# Altium PCB USBc to Ethernet(2.0).PcbDoc (part 2 of 3)
Units mil, origin at the board's own origin, x right, y up, seen from the top; angles counter-clockwise.
Board outline 2450 x 1100 mil, 4 copper layers (L1, L2, L3, L4), stack 61.58 mil thick; 85 components, 67 nets, 300 pads, 234 vias.
Unrouted connection lines stored in the file: 3.
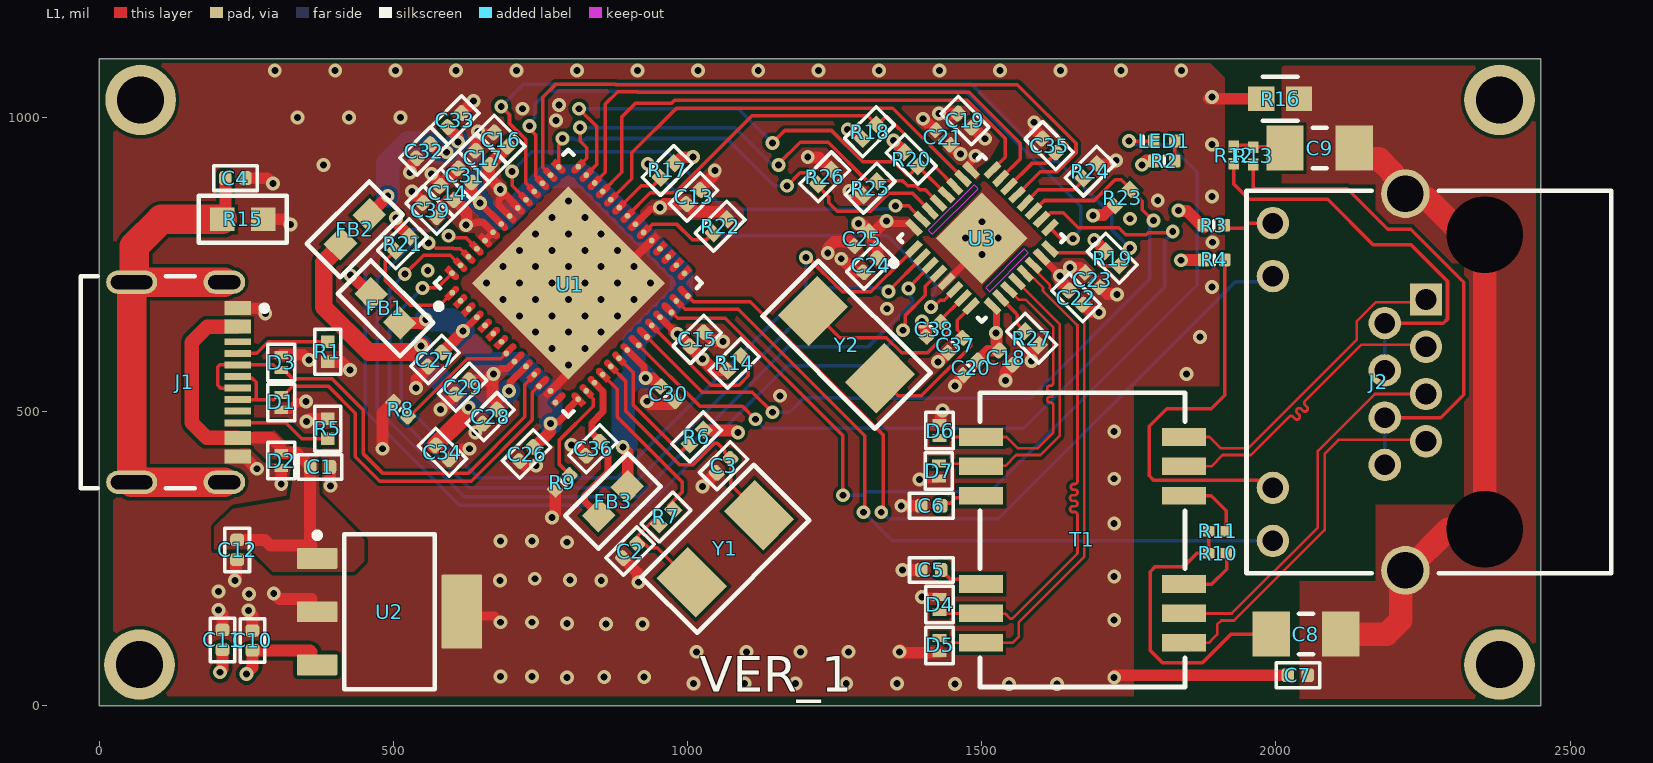
[diagram p0: L1 view]

## Part data (continued)
D2 D6: "TVS DIODE 5.3VWM 12VC SOD882", LCSC Part Number=C3710326, Manufacturer=Littelfuse, Max Breakdown Voltage=9V, Max Operating Temperature=150°C, Min Breakdown Voltage=6.8V, Min Operating Temperature=-55°C, Non-rep Peak Rev Power Dis-Max=40W, Package Body Material=Plastic, Package Shape=Rectangular, Package Style="CHIP CARRIERMeter", Rep Pk Reverse Voltage-Max=5.3V, Supplier Part Number=F9321CT-ND, Category="TVS Diodes", ComponentLink1Description=https://datasheet.ciiva.com:443/pdfs/VipMasterIC/IC/LFSI/LFSI-S-A0007892042/LFSI-S-A0007892042-1.pdf?src-supplier=IHS+Markit, ComponentLink1URL=https://datasheet.ciiva.com:443/pdfs/VipMasterIC/IC/LFSI/LFSI-S-A0007892042/LFSI-S-A0007892042-1.pdf?src-supplier=IHS+Markit, ComponentLink2Description=https://www.littelfuse.com/~/media/electronics/datasheets/tvs_diode_arrays/littelfuse_tvs_diode_array_aq3045_datasheet.pdf.pdf?src-supplier=Digikey, ComponentLink2URL=https://www.littelfuse.com/~/media/electronics/datasheets/tvs_diode_arrays/littelfuse_tvs_diode_array_aq3045_datasheet.pdf.pdf?src-supplier=Digikey, ComponentLink3Description=http://www.littelfuse.com/~/media/electronics/datasheets/tvs_diode_arrays/littelfuse_tvs_diode_array_aq3045_datasheet.pdf.pdf?src-supplier=Digikey, ComponentLink3URL=http://www.littelfuse.com/~/media/electronics/datasheets/tvs_diode_arrays/littelfuse_tvs_diode_array_aq3045_datasheet.pdf.pdf?src-supplier=Digikey, Diode Element Material=SILICON, Diode Type="TRANS VOLTAGE SUPPRESSOR", Manufacturer Part Number=AQ3045-01ETG, Number of Elements=1, Pins=2, Polarity=Bidirectional, Pricing="1=0.5, 10=0.391, 100=0.2344, 500=0.217, 1000=0.14756, 2000=0.13585, 5000=0.1302 (USD)", Reach SVHC Compliant=Yes, Reference Standard=AEC-Q101, RoHS=Yes, RoHS Compliant=Yes, Stock=21664, Supplier=Digikey, Surface Mount=Yes, Technology=AVALANCHE, Terminal Form="No Lead", Terminal Position=BOTTOM
FB1 FB2 FB3: library part MMZ1608B121CTAH0, "FERRITE BEAD 120 OHM 0603 1LN", Case Code (Imperial)=0603, Case Code (Metric)=1608, Current Rating=600mA, DC Resistance (DCR)=150mΩ, Manufacturer=TDK, Manufacturer Lifecycle Status=PRODUCTION, Max Operating Temperature=125°C, Min Operating Temperature=-55°C, Test Frequency=100MHz, Tolerance=25%, Case/Package=0603, Category="Ferrite Beads and Chips", ComponentLink1Description=https://datasheet.octopart.com:443/MMZ1608B121CTAH0-TDK-datasheet-151651381.pdf?src-supplier=ODG+(Origin+Data+Global), ComponentLink1URL=https://datasheet.octopart.com:443/MMZ1608B121CTAH0-TDK-datasheet-151651381.pdf?src-supplier=ODG+(Origin+Data+Global), ComponentLink2Description=https://datasheet.octopart.com:443/MMZ1608B121CTAH0-TDK-datasheet-41213274.pdf?src-supplier=Upverter, ComponentLink2URL=https://datasheet.octopart.com:443/MMZ1608B121CTAH0-TDK-datasheet-41213274.pdf?src-supplier=Upverter, ComponentLink3Description=https://datasheet.octopart.com:443/MMZ1608B121CTAH0-TDK-datasheet-82475256.pdf?src-supplier=Newark, ComponentLink3URL=https://datasheet.octopart.com:443/MMZ1608B121CTAH0-TDK-datasheet-82475256.pdf?src-supplier=Newark, ComponentLink4Description=https://datasheet.octopart.com:443/MMZ1608B121CTAH0-TDK-datasheet-101614771.pdf?src-supplier=Newark, ComponentLink4URL=https://datasheet.octopart.com:443/MMZ1608B121CTAH0-TDK-datasheet-101614771.pdf?src-supplier=Newark, ComponentLink5Description=https://datasheet.octopart.com:443/MMZ1608B121CTAH0-TDK-datasheet-17595614.pdf?src-supplier=TME, ComponentLink5URL=https://datasheet.octopart.com:443/MMZ1608B121CTAH0-TDK-datasheet-17595614.pdf?src-supplier=TME, Core Material=Ferrite, Depth=800µm, Export Control Classification Number (ECCN) Code=EAR99, Harmonized Tariff Schedule (HTS) Code=8504.50.80.00, Height=600µm, Impedance=120Ω, Introduction Date=2009-03-27, Length=1.6mm, Lifecycle Status=Production, Manufacturer Part Number=MMZ1608B121CTAH0, Max DC Current=600mA, Max Length=1.75mm, Max Width=950µm, Min Length=1.45mm, Min Width=650µm, Mount="Surface Mount", Number of Circuits=1, Number of Terminals=2, Pricing 1="1=0.1, 10=0.053, 25=0.046, 50=0.0414, 100=0.0372, 250=0.03208, 500=0.02858, 1000=0.02535 (USD)", REACH SVHC=Unaffected, Resistance=150mΩ, RMS Current (Irms)=600mA, RoHS=Compliant, Schedule B="8504500000, 8504500000|8504500000|8504500000|8504500000|8504500000", Series Resistance=150mΩ, Stock 1=284237, Supplier 1=DigiKey, Width=800µm
J1: library part 217179-0001, "USB-C (USB TYPE-C) USB 2.0 Receptacle Connector 24 (16+8 Dummy) Position Surface Mount, Right Angle; Through Hole", Contact Resistance=50mΩ, Current Rating=1.25A, Dielectric Material=Polyamide, Insulation Color=Black, Insulation Resistance=100MΩ, Manufacturer=Molex, Manufacturer Lifecycle Status=ACTIVE, Max Operating Temperature=85°C, Min Operating Temperature=-40°C, Voltage Rating=30V, Category="USB Connectors", China RoHS=Compliant, ComponentLink1Description=https://datasheet.octopart.com:443/217179-0001-Molex-datasheet-158871109.pdf?src-supplier=ODG+(Origin+Data+Global), ComponentLink1URL=https://datasheet.octopart.com:443/217179-0001-Molex-datasheet-158871109.pdf?src-supplier=ODG+(Origin+Data+Global), ComponentLink2Description=https://sigma.octopart.com:443/158871110/technical_drawing/Molex-217179-0001.pdf?src-supplier=Upverter, ComponentLink2URL=https://sigma.octopart.com:443/158871110/technical_drawing/Molex-217179-0001.pdf?src-supplier=Upverter, ComponentLink3Description=https://datasheet.octopart.com:443/217179-0001-Molex-datasheet-164573281.pdf?src-supplier=RS+(Formerly+Allied+Electronics), ComponentLink3URL=https://datasheet.octopart.com:443/217179-0001-Molex-datasheet-164573281.pdf?src-supplier=RS+(Formerly+Allied+Electronics), ComponentLink4Description=http://sigma.octopart.com:80/reach_statement/Molex-company-74.pdf?src-supplier=Compliance+Statements, ComponentLink4URL=http://sigma.octopart.com:80/reach_statement/Molex-company-74.pdf?src-supplier=Compliance+Statements, ComponentLink5Description=http://sigma.octopart.com:80/rohs_statement/Molex-company-73.pdf?src-supplier=Compliance+Statements, ComponentLink5URL=http://sigma.octopart.com:80/rohs_statement/Molex-company-73.pdf?src-supplier=Compliance+Statements, ComponentLink6Description=http://sigma.octopart.com:80/conflict_mineral_statement/Molex-company-72.pdf?src-supplier=Compliance+Statements, ComponentLink6URL=http://sigma.octopart.com:80/conflict_mineral_statement/Molex-company-72.pdf?src-supplier=Compliance+Statements, Contact Material="Gold, Nickel", Country of Origin="Mainland China", Export Control Classification Number (ECCN) Code=EAR99, Gender=Female, Harmonized Tariff Schedule (HTS) Code=8536.69.40.30, Height=3.36mm, Introduction Date=2021-08-30, Lifecycle Status=Production, Manufacturer Part Number=217179-0001, Number of Contacts=16, Number of Ports=1, Number of Positions=16, Number of Rows=1, Orientation="Right Angle", Pricing 1="1=0.9, 10=0.764, 25=0.7156, 50=0.6814, 100=0.6487, 250=0.60808, 500=0.57902 (USD)", REACH SVHC=Unaffected, RoHS=Compliant, Shell Finish=Nickel, Shell Material="Stainless Steel", Stock 1=93695, Supplier 1=DigiKey, Terminal Pitch=500µm, USB Standard="USB 2.0"
J2: library part CMP-2000-06980-1, "High Speed RJ45, Modular Jack, 8 Position, 8 Contacts, Shielded, with LEDs, -55 to 85 degC,12-Pin THD, RoHS, Tray", LED Color=Yellow-Green, Manufacturer=Amphenol, Operating Temperature=-55°C~85°C, Package Description="12-Pin Through Hole Device, Body 16.51 x 15.75 mm", Ratings=-, Standard Package=120, 3D Model=RJHSE538x.stpRJHSE538x.igs, Catalog Drawings=RJ45SeriesRightAngle, Category=Connectors,Interconnects, Connector Type=Jack, Contact Finish=Gold, Contact Finish Thickness=50µin(1.27µm), Contact Material=PhosphorBronze, Datasheet URL=https://datasheet.ciiva.com/16481/rjhse538x-16481714.pdf, Datasheet Version="Rev. K, 04/2014", Family=ModularConnectors-Jacks, Featured Product=ModularJacksProductSolutions, Features=BoardLock, Housing Material=Thermoplastic, Ingress Protection=-, Manufacturer URL=http://www.amphenol.com/, Mounting Technology=ThroughHole, Mounting Type=ThroughHole, Number of Ports=1, Number of Positions/Contacts=8p8c(RJ45,Ethernet), Number of Rows=1, Online Catalog=RJHSESeries, Orientation=90°Angle(Right), Other Names=RJHSE5381, Package Reference=RJHSE-5381, Packaging=Tray, PCN Design/Specification=MultipleSeriesCopper29/Jan/2009RJHSEShieldMaterial30/Jun/2015, Series=RJHSE, Shielding=Shielded,EMIFinger, Tab Direction=Up, Termination=Solder
LED1: library part CMP-007-00042-3, "Chip LED 0402, Blue, 0.02 A, 3.1 to 3.7 V, -40 to 80 degC, 2-Pin SMD, RoHS, Tape and Reel", Case/Package=0402, Colour=Blue, Mounting Technology=SMT, Pins=2, RoHS Compliant=Yes
R1 R5: library part AF0402FR-075K1L, "5.1 kOhms ±1% 0.063W, 1/16W Chip Resistor 0402 (1005 Metric) Anti-Sulfur, Automotive AEC-Q200 Thick Film", Case/Package=0402, Manufacturer="Yageo Group", Max Operating Temperature=155°C, Max Power Dissipation=63mW, Min Operating Temperature=-55°C, Power Rating=62.5mW, Ratings=AEC-Q200, Resistance=5.1kΩ, Temperature Coefficient=100ppm/°C, Tolerance=1%, Voltage Rating=50V, Category="Chip SMD Resistors", China RoHS=Non-Compliant, ComponentLink1Description=https://datasheet.octopart.com:443/AF0402FR-075K1L-Yageo-datasheet-182189395.pdf?src-supplier=IHS, ComponentLink1URL=https://datasheet.octopart.com:443/AF0402FR-075K1L-Yageo-datasheet-182189395.pdf?src-supplier=IHS, ComponentLink2Description=https://datasheet.octopart.com:443/AF0402FR-075K1L-Yageo-datasheet-153645569.pdf?src-supplier=Upverter, ComponentLink2URL=https://datasheet.octopart.com:443/AF0402FR-075K1L-Yageo-datasheet-153645569.pdf?src-supplier=Upverter, ComponentLink3Description=https://sigma.octopart.com:443/138820526/technical_drawing/Yageo-AF0402FR-075K1L.pdf?src-supplier=Upverter, ComponentLink3URL=https://sigma.octopart.com:443/138820526/technical_drawing/Yageo-AF0402FR-075K1L.pdf?src-supplier=Upverter, ComponentLink4Description=https://datasheet.octopart.com:443/AF0402FR-075K1L-Yageo-Group-datasheet-183876366.pdf?src-supplier=LCSC, ComponentLink4URL=https://datasheet.octopart.com:443/AF0402FR-075K1L-Yageo-Group-datasheet-183876366.pdf?src-supplier=LCSC, ComponentLink5Description=https://datasheet.octopart.com:443/AF0402FR-075K1L-Yageo-datasheet-164730775.pdf?src-supplier=Future+Electronics, ComponentLink5URL=https://datasheet.octopart.com:443/AF0402FR-075K1L-Yageo-datasheet-164730775.pdf?src-supplier=Future+Electronics, ComponentLink6Description=https://datasheet.octopart.com:443/AF0402FR-075K1L-Yageo-datasheet-137481464.pdf?src-supplier=Future+Electronics, ComponentLink6URL=https://datasheet.octopart.com:443/AF0402FR-075K1L-Yageo-datasheet-137481464.pdf?src-supplier=Future+Electronics, ComponentLink7Description=https://datasheet.octopart.com:443/AF0402FR-075K1L-Yageo-datasheet-65873192.pdf?src-supplier=Future+Electronics, ComponentLink7URL=https://datasheet.octopart.com:443/AF0402FR-075K1L-Yageo-datasheet-65873192.pdf?src-supplier=Future+Electronics, ComponentLink8Description=https://datasheet.octopart.com:443/AF0402FR-075K1L-Yageo-datasheet-39119213.pdf?src-supplier=Future+Electronics, ComponentLink8URL=https://datasheet.octopart.com:443/AF0402FR-075K1L-Yageo-datasheet-39119213.pdf?src-supplier=Future+Electronics, ComponentLink9Description=https://datasheet.octopart.com:443/AF0402FR-075K1L-Yageo-datasheet-34148693.pdf?src-supplier=Future+Electronics, ComponentLink9URL=https://datasheet.octopart.com:443/AF0402FR-075K1L-Yageo-datasheet-34148693.pdf?src-supplier=Future+Electronics, ComponentLink10Description=https://datasheet.octopart.com:443/AF0402FR-075K1L-Yageo-datasheet-27714391.pdf?src-supplier=Future+Electronics, ComponentLink10URL=https://datasheet.octopart.com:443/AF0402FR-075K1L-Yageo-datasheet-27714391.pdf?src-supplier=Future+Electronics, ComponentLink11Description=https://datasheet.octopart.com:443/AF0402FR-075K1L-Yageo-datasheet-20945081.pdf?src-supplier=Future+Electronics, ComponentLink11URL=https://datasheet.octopart.com:443/AF0402FR-075K1L-Yageo-datasheet-20945081.pdf?src-supplier=Future+Electronics, ComponentLink12Description=https://datasheet.octopart.com/AF0402FR-075K1L-Yageo-datasheet-68296209.pdf, ComponentLink12URL=https://datasheet.octopart.com/AF0402FR-075K1L-Yageo-datasheet-68296209.pdf, ComponentLink13Description=http://sigma.octopart.com:80/conflict_mineral_statement/Yageo-company-3.pdf?src-supplier=Compliance+Statements, ComponentLink13URL=http://sigma.octopart.com:80/conflict_mineral_statement/Yageo-company-3.pdf?src-supplier=Compliance+Statements, ComponentLink14Description=http://sigma.octopart.com:80/rohs_statement/Yageo-company-2.pdf?src-supplier=Compliance+Statements, ComponentLink14URL=http://sigma.octopart.com:80/rohs_statement/Yageo-company-2.pdf?src-supplier=Compliance+Statements, Composition="Thick Film", Features="Anti-Sulfur, Moisture Resistant", Height=350µm, Lead Free="Lead Free", Length=1mm, Lifecycle Status=Production, Manufacturer Part Number=AF0402FR-075K1L, Mount="Surface Mount", Number of Terminals=2, Number of Terminations=2, Pricing 1="1=0.1, 10=0.041, 25=0.0312, 50=0.0256, 100=0.0212, 250=0.01684, 500=0.01436, 1000=0.01241, 5000=0.00931 (USD)", REACH SVHC=Unaffected, RoHS=Compliant, Stock 1=1902, Supplier 1=DigiKey, Width=500µm, Working Voltage=50V
R2 R3 R4: library part CMP-009-00132-3, "Chip Resistor, 330 Ohms, +/-5 %, 63 mW, -55 to 155 degC, 0402", Case/Package=0402, Max Operating Temperature=155°C, Min Operating Temperature=-55°C, Power=63mW, Tolerance=5%, Pins=2
R6: library part RC0402JR-070RL, "RES 0 OHM JUMPER 1/16W 0402", Case/Package=0402, LCSC Part Number=C60485, Manufacturer=Yageo, Max Operating Temperature=155°C, Min Operating Temperature=-55°C, Package Height=0.35mm, Package Length=1mm, Package Shape=Rectangular, Package Style=SMTMeter, Package Width=0.5mm, Power=62.5mW, Rated Temperature=70°C, Resistor Type="FIXED RESISTOR", Supplier Part Number=311-0.0JRCT-ND, Category="Chip SMD Resistors", ComponentLink1Description=https://datasheet.ciiva.com:443/pdfs/VipMasterIC/IC/YAGO/YAGO-S-A0008145938/YAGO-S-A0008145938-1.pdf?src-supplier=IHS+Markit, ComponentLink1URL=https://datasheet.ciiva.com:443/pdfs/VipMasterIC/IC/YAGO/YAGO-S-A0008145938/YAGO-S-A0008145938-1.pdf?src-supplier=IHS+Markit, Construction=Chip, JESD-609 Code=e3, Manufacturer Part Number=RC0402JR-070RL, Mounting Technology="Surface Mount", Packaging="Tape and Reel", Pins=2, Pricing="1=0.1, 10=0.011, 25=0.0084, 50=0.0064, 100=0.0045, 250=0.00364, 500=0.0029, 1000=0.00214, 5000=0.00154 (USD)", Reach SVHC Compliant=Yes, RoHS=Yes, RoHS Compliant=Yes, Stock=5988729, Supplier=Digikey, Technology="METAL GLAZE/THICK FILM", Terminal Finish=Nickel, Termination=Wraparound
R7: library part RT0402FRE07500RL, "500 Ohms 1% 0.063W, 1/16W Chip Resistor 0402 (1005 Metric) Moisture Resistant", Case/Package=0402, Manufacturer="Yageo Group", Max Operating Temperature=155°C, Min Operating Temperature=-55°C, Power Rating=63mW, Resistance=500Ω, Temperature Coefficient=50ppm/°C, Tolerance=1%, Voltage Rating=50V, Category="Chip SMD Resistors", ComponentLink1Description=https://datasheet.octopart.com:443/RT0402FRE07500RL-Yageo-datasheet-176402239.pdf?src-supplier=element14+APAC, ComponentLink1URL=https://datasheet.octopart.com:443/RT0402FRE07500RL-Yageo-datasheet-176402239.pdf?src-supplier=element14+APAC, ComponentLink2Description=https://sigma.octopart.com:443/138820526/technical_drawing/Yageo-RT0402FRE07500RL.pdf?src-supplier=Upverter, ComponentLink2URL=https://sigma.octopart.com:443/138820526/technical_drawing/Yageo-RT0402FRE07500RL.pdf?src-supplier=Upverter, ComponentLink3Description=https://datasheet.octopart.com:443/RT0402FRE07500RL-Yageo-Group-datasheet-188167888.pdf?src-supplier=LCSC, ComponentLink3URL=https://datasheet.octopart.com:443/RT0402FRE07500RL-Yageo-Group-datasheet-188167888.pdf?src-supplier=LCSC, ComponentLink4Description=https://datasheet.octopart.com/RT0402FRE07500RL-Yageo-datasheet-86813807.pdf, ComponentLink4URL=https://datasheet.octopart.com/RT0402FRE07500RL-Yageo-datasheet-86813807.pdf, ComponentLink5Description=http://sigma.octopart.com:80/conflict_mineral_statement/Yageo-company-3.pdf?src-supplier=Compliance+Statements, ComponentLink5URL=http://sigma.octopart.com:80/conflict_mineral_statement/Yageo-company-3.pdf?src-supplier=Compliance+Statements, ComponentLink6Description=http://sigma.octopart.com:80/rohs_statement/Yageo-company-2.pdf?src-supplier=Compliance+Statements, ComponentLink6URL=http://sigma.octopart.com:80/rohs_statement/Yageo-company-2.pdf?src-supplier=Compliance+Statements, Composition="Thin Film", Height=350µm, Manufacturer Part Number=RT0402FRE07500RL, Packaging="Tape & Reel", Pricing 1="1=0.1, 10=0.014, 50=0.0126, 100=0.0119, 500=0.01044 (USD)", RoHS=Compliant, Supplier 1=DigiKey
R8 R9: library part CMP-009-00071-2, "12K 0.063W 1% 0402 (1005 Metric)  SMD", Case/Package=0402, Power=63mW, Tolerance=1%, Mounting Technology=SMT, Pins=2
R10 R11 R12 R13: library part CMP-2002-07798-1, Manufacturer="Yageo / Phycomp", Part Number=RC0402FR-0775RL
R14 R18 R19 R20 R21 R22 R24 R25 R26: library part AC0402FR-0710KL, "RES SMD 10K OHM 1% 1/16W 0402", Case Code (Imperial)=0402, Case Code (Metric)=1005, Manufacturer="Yageo Group", Max Operating Temperature=155°C, Max Power Dissipation=63mW, Min Operating Temperature=-55°C, Power Rating=62.5mW, Ratings=AEC-Q200, Resistance=10kΩ, Temperature Coefficient=100ppm/°C, Tolerance=1%, Voltage Rating=50V, Case/Package=0402, Category="Chip SMD Resistors", China RoHS=Non-Compliant, ComponentLink1Description=https://datasheet.octopart.com:443/AC0402FR-0710KL-Yageo-datasheet-182189377.pdf?src-supplier=IHS, ComponentLink1URL=https://datasheet.octopart.com:443/AC0402FR-0710KL-Yageo-datasheet-182189377.pdf?src-supplier=IHS, ComponentLink2Description=https://datasheet.octopart.com:443/AC0402FR-0710KL-Yageo-datasheet-83209224.pdf?src-supplier=Upverter, ComponentLink2URL=https://datasheet.octopart.com:443/AC0402FR-0710KL-Yageo-datasheet-83209224.pdf?src-supplier=Upverter, ComponentLink3Description=https://datasheet.octopart.com:443/AC0402FR-0710KL-Yageo-datasheet-178509465.pdf?src-supplier=Newark, ComponentLink3URL=https://datasheet.octopart.com:443/AC0402FR-0710KL-Yageo-datasheet-178509465.pdf?src-supplier=Newark, ComponentLink4Description=https://datasheet.octopart.com:443/AC0402FR-0710KL-Yageo-datasheet-166720450.pdf?src-supplier=JRH+Electronics, ComponentLink4URL=https://datasheet.octopart.com:443/AC0402FR-0710KL-Yageo-datasheet-166720450.pdf?src-supplier=JRH+Electronics, ComponentLink5Description=https://datasheet.octopart.com:443/AC0402FR-0710KL-Yageo-datasheet-151884373.pdf?src-supplier=Future+Electronics, ComponentLink5URL=https://datasheet.octopart.com:443/AC0402FR-0710KL-Yageo-datasheet-151884373.pdf?src-supplier=Future+Electronics, ComponentLink6Description=https://datasheet.octopart.com:443/AC0402FR-0710KL-Yageo-Group-datasheet-189830439.pdf?src-supplier=Future+Electronics, ComponentLink6URL=https://datasheet.octopart.com:443/AC0402FR-0710KL-Yageo-Group-datasheet-189830439.pdf?src-supplier=Future+Electronics, ComponentLink7Description=https://datasheet.octopart.com:443/AC0402FR-0710KL-Yageo-datasheet-137699919.pdf?src-supplier=Future+Electronics, ComponentLink7URL=https://datasheet.octopart.com:443/AC0402FR-0710KL-Yageo-datasheet-137699919.pdf?src-supplier=Future+Electronics, ComponentLink8Description=https://datasheet.octopart.com:443/AC0402FR-0710KL-Yageo-datasheet-24580492.pdf?src-supplier=Future+Electronics, ComponentLink8URL=https://datasheet.octopart.com:443/AC0402FR-0710KL-Yageo-datasheet-24580492.pdf?src-supplier=Future+Electronics, ComponentLink9Description=https://datasheet.octopart.com:443/AC0402FR-0710KL-Yageo-datasheet-13029202.pdf?src-supplier=Future+Electronics, ComponentLink9URL=https://datasheet.octopart.com:443/AC0402FR-0710KL-Yageo-datasheet-13029202.pdf?src-supplier=Future+Electronics, ComponentLink10Description=https://datasheet.octopart.com/AC0402FR-0710KL-Yageo-datasheet-12512238.pdf, ComponentLink10URL=https://datasheet.octopart.com/AC0402FR-0710KL-Yageo-datasheet-12512238.pdf, ComponentLink11Description=https://datasheet.octopart.com:443/AC0402FR-0710KL-Yageo-Group-datasheet-164768995.pdf?src-supplier=ODG+(Origin+Data+Global), ComponentLink11URL=https://datasheet.octopart.com:443/AC0402FR-0710KL-Yageo-Group-datasheet-164768995.pdf?src-supplier=ODG+(Origin+Data+Global), ComponentLink12Description=https://datasheet.octopart.com:443/AC0402FR-0710KL-Yageo-datasheet-128677448.pdf?src-supplier=X-ON, ComponentLink12URL=https://datasheet.octopart.com:443/AC0402FR-0710KL-Yageo-datasheet-128677448.pdf?src-supplier=X-ON, ComponentLink13Description=http://sigma.octopart.com:80/conflict_mineral_statement/Yageo-company-3.pdf?src-supplier=Compliance+Statements, ComponentLink13URL=http://sigma.octopart.com:80/conflict_mineral_statement/Yageo-company-3.pdf?src-supplier=Compliance+Statements, ComponentLink14Description=http://sigma.octopart.com:80/rohs_statement/Yageo-company-2.pdf?src-supplier=Compliance+Statements, ComponentLink14URL=http://sigma.octopart.com:80/rohs_statement/Yageo-company-2.pdf?src-supplier=Compliance+Statements, Composition="Thick Film", Country of Origin="Mainland China, Taiwan", Depth=500µm, Export Control Classification Number (ECCN) Code=EAR99, Features="Automotive AEC-Q200, Moisture Resistant", Harmonized Tariff Schedule (HTS) Code=8533.21.00.30, Height=320µm, Introduction Date=2012-04-10, Lead Free="Lead Free", Length=1mm, Lifecycle Status=Production, Manufacturer Part Number=AC0402FR-0710KL, Military Standard=Not, Mount="Surface Mount", Number of Terminals=2, Number of Terminations=2, Packaging="Tape & Reel", Pricing 1="1=0.1, 10=0.024, 25=0.0176, 50=0.014, 100=0.0114, 250=0.00876, 500=0.00726, 1000=0.00612, 5000=0.00431 (USD)", REACH SVHC=Unaffected, RoHS=Compliant, Schedule B="8533210045, 8533210045|8533210045|8533210045|8533210045|8533210045|8533210045|8533210045|8533210045|8533210045|8533210045|8533210045|8533210045|8533210045|8533210045|8533210045|8533210045|8533210045|8533210045|8533210045, 8533210045|8533210045|8533210045|8533210045|8533210045|8533210045|8533210045|8533210045|8533210045|8533210045|8533210045|8533210045|8533210045|8533210045|8533210045|8533210045|8533210045|8533210045|8533210045|8533210045|8533210045|8533210045|8533210045|85", Stock 1=3191206, Supplier 1=DigiKey, Termination=SMD/SMT, Width=500µm, Working Voltage=50V
R15: library part AC0603FR-0710ML, "Res Thick Film 0603 10M Ohm 1% 0.1W(1/10W) ±100ppm/C Pad SMD T/R Automotive AEC-Q200", Case Code (Imperial)=0603, Case Code (Metric)=1608, Manufacturer="Yageo Group", Max Operating Temperature=155°C, Max Power Dissipation=100mW, Min Operating Temperature=-55°C, Ratings=AEC-Q200, Resistance=10MΩ, Temperature Coefficient=100ppm/°C, Tolerance=1%, Voltage Rating=75V, Case/Package=0603, Category="Chip SMD Resistors", China RoHS=Non-Compliant, ComponentLink1Description=https://datasheet.octopart.com:443/AC0603FR-0710ML-Yageo-datasheet-182189377.pdf?src-supplier=IHS, ComponentLink1URL=https://datasheet.octopart.com:443/AC0603FR-0710ML-Yageo-datasheet-182189377.pdf?src-supplier=IHS, ComponentLink2Description=https://datasheet.octopart.com:443/AC0603FR-0710ML-Yageo-datasheet-86786639.pdf?src-supplier=Upverter, ComponentLink2URL=https://datasheet.octopart.com:443/AC0603FR-0710ML-Yageo-datasheet-86786639.pdf?src-supplier=Upverter, ComponentLink3Description=https://datasheet.octopart.com:443/AC0603FR-0710ML-Yageo-datasheet-178509465.pdf?src-supplier=Newark, ComponentLink3URL=https://datasheet.octopart.com:443/AC0603FR-0710ML-Yageo-datasheet-178509465.pdf?src-supplier=Newark, ComponentLink4Description=https://datasheet.octopart.com:443/AC0603FR-0710ML-Yageo-Group-datasheet-188689268.pdf?src-supplier=LCSC, ComponentLink4URL=https://datasheet.octopart.com:443/AC0603FR-0710ML-Yageo-Group-datasheet-188689268.pdf?src-supplier=LCSC, ComponentLink5Description=https://datasheet.octopart.com:443/AC0603FR-0710ML-Yageo-datasheet-166720450.pdf?src-supplier=Future+Electronics, ComponentLink5URL=https://datasheet.octopart.com:443/AC0603FR-0710ML-Yageo-datasheet-166720450.pdf?src-supplier=Future+Electronics, ComponentLink6Description=https://datasheet.octopart.com:443/AC0603FR-0710ML-Yageo-datasheet-151884373.pdf?src-supplier=Future+Electronics, ComponentLink6URL=https://datasheet.octopart.com:443/AC0603FR-0710ML-Yageo-datasheet-151884373.pdf?src-supplier=Future+Electronics, ComponentLink7Description=https://datasheet.octopart.com:443/AC0603FR-0710ML-Yageo-datasheet-137699919.pdf?src-supplier=Future+Electronics, ComponentLink7URL=https://datasheet.octopart.com:443/AC0603FR-0710ML-Yageo-datasheet-137699919.pdf?src-supplier=Future+Electronics, ComponentLink8Description=https://datasheet.octopart.com:443/AC0603FR-0710ML-Yageo-datasheet-128678881.pdf?src-supplier=X-ON, ComponentLink8URL=https://datasheet.octopart.com:443/AC0603FR-0710ML-Yageo-datasheet-128678881.pdf?src-supplier=X-ON, ComponentLink9Description=https://datasheet.octopart.com/AC0603FR-0710ML-Yageo-datasheet-12512238.pdf, ComponentLink9URL=https://datasheet.octopart.com/AC0603FR-0710ML-Yageo-datasheet-12512238.pdf, ComponentLink10Description=http://sigma.octopart.com:80/conflict_mineral_statement/Yageo-company-3.pdf?src-supplier=Compliance+Statements, ComponentLink10URL=http://sigma.octopart.com:80/conflict_mineral_statement/Yageo-company-3.pdf?src-supplier=Compliance+Statements, ComponentLink11Description=http://sigma.octopart.com:80/rohs_statement/Yageo-company-2.pdf?src-supplier=Compliance+Statements, ComponentLink11URL=http://sigma.octopart.com:80/rohs_statement/Yageo-company-2.pdf?src-supplier=Compliance+Statements, Composition="Thick Film", Country of Origin="Mainland China, Taiwan", Export Control Classification Number (ECCN) Code=EAR99, Features="Automotive AEC-Q200, Moisture Resistant", Harmonized Tariff Schedule (HTS) Code=8533.21.00.30, Height=450µm, Introduction Date=2012-04-10, Length=1.6mm, Lifecycle Status=Production, Manufacturer Part Number=AC0603FR-0710ML, Mount="Surface Mount", Number of Terminals=2, Number of Terminations=2, Packaging="Tape & Reel", Power Rating=100mW, Pricing 1="1=0.1, 10=0.028, 25=0.0204, 50=0.0164, 100=0.0134, 250=0.01036, 500=0.00868, 1000=0.00735 (USD)", REACH SVHC=Unaffected, RoHS=Compliant, Schedule B="8533210045, 8533210045|8533210045|8533210045|8533210045|8533210045|8533210045|8533210045|8533210045|8533210045|8533210045|8533210045|8533210045|8533210045, 8533210045|8533210045|8533210045|8533210045|8533210045|8533210045|8533210045|8533210045|8533210045|8533210045|8533210045|8533210045|8533210045|8533210045, 8533210045|8533210045|8533210045|8533210045|8533210045|8533210045|8533210045|8533210045|8533210045|8533210045|8533210045|8533210045|8533210045|8533210045|8533210045", Stock 1=74416, Supplier 1=DigiKey, Termination=SMD/SMT, Weight=2.012816mg, Width=800µm, Working Voltage=75V
R16: library part CMP-2000-03843-2, "RES Thick Film, 10MΩ, 1%, 0.1W, 100ppm/°C, 0603", Case Code (Imperial)=0603, Case Code (Metric)=1608, Max Operating Temperature=155°C, Min Operating Temperature=-55°C, Package Quantity=5000, Power Rating=100mW, Resistance=10MR, Temperature Coefficient=100ppm/°C, Tolerance=1%, Voltage Rating=75V, Case/Package=0603, Composition="Thick Film", Contact Plating=Tin, Depth=0.85mm, Height=0.45mm, Lead Free="Lead Free", Length=1.55mm, Military Standard=Not, Mount="Surface Mount", Number of Terminations=2, Packaging="Tape and Reel", Radiation Hardening=No, Termination=SMD/SMT, Voltage Rating (DC)=75V, Weight=7.1E-05oz, Width=0.85mm, Working Voltage=75V
R17: library part RC0402FR-071KL, "RES 1K OHM 1% 1/16W 0402", Case/Package=0402, LCSC Part Number=C106235, Manufacturer=Yageo, Max Operating Temperature=155°C, Min Operating Temperature=-55°C, Package Height=0.35mm, Package Length=1mm, Package Shape=Rectangular, Package Style=SMTMeter, Package Width=0.5mm, Power=62.5mW, Rated Temperature=70°C, Resistor Type="FIXED RESISTOR", Supplier Part Number=311-1.00KLRCT-ND, Temperature Coefficient=100ppm/°C, Tolerance=1%, Working Voltage=50V, Additional Feature="LASER TRIMMABLE", Category="Chip SMD Resistors", ComponentLink1Description=https://datasheet.ciiva.com:443/pdfs/VipMasterIC/IC/YAGO/YAGO-S-A0008145938/YAGO-S-A0008145938-1.pdf?src-supplier=IHS+Markit, ComponentLink1URL=https://datasheet.ciiva.com:443/pdfs/VipMasterIC/IC/YAGO/YAGO-S-A0008145938/YAGO-S-A0008145938-1.pdf?src-supplier=IHS+Markit, ComponentLink2Description=https://datasheet.ciiva.com/11819/0900766b80c66297-11819477.pdf?src-supplier=Rs, ComponentLink2URL=https://datasheet.ciiva.com/11819/0900766b80c66297-11819477.pdf?src-supplier=Rs, ComponentLink3Description=https://datasheet.ciiva.com/22747/1018594-22747513.pdf?src-supplier=Element14, ComponentLink3URL=https://datasheet.ciiva.com/22747/1018594-22747513.pdf?src-supplier=Element14, ComponentLink4Description=https://datasheet.ciiva.com/12666/pyu-rc0402-51-rohs-l-6-r-12666741.pdf?src-supplier=Mouser, ComponentLink4URL=https://datasheet.ciiva.com/12666/pyu-rc0402-51-rohs-l-6-r-12666741.pdf?src-supplier=Mouser, ComponentLink5Description=https://datasheet.ciiva.com/17063/pyu-rc0402-51-rohs-l-6-r-17063193.pdf?src-supplier=Future+Electronics, ComponentLink5URL=https://datasheet.ciiva.com/17063/pyu-rc0402-51-rohs-l-6-r-17063193.pdf?src-supplier=Future+Electronics, ComponentLink6Description=https://datasheet.ciiva.com/7983/1018594-7983502.pdf?src-supplier=Element14, ComponentLink6URL=https://datasheet.ciiva.com/7983/1018594-7983502.pdf?src-supplier=Element14, ComponentLink7Description=https://datasheet.ciiva.com/7849/1018594-7849869.pdf?src-supplier=Element14, ComponentLink7URL=https://datasheet.ciiva.com/7849/1018594-7849869.pdf?src-supplier=Element14, ComponentLink8Description=https://datasheet.ciiva.com/7849/1018594-7849871.pdf?src-supplier=Element14, ComponentLink8URL=https://datasheet.ciiva.com/7849/1018594-7849871.pdf?src-supplier=Element14, Construction=Chip, JESD-609 Code=e3, Manufacturer Part Number=RC0402FR-071KL, Mounting Technology="Surface Mount", Packaging="Tape and Reel", Pins=2, Pricing="1=0.1, 10=0.015, 50=0.0088, 100=0.0073, 500=0.00488, 1000=0.00417, 5000=0.00297 (USD)", Reach SVHC Compliant=Yes, RoHS=Yes, RoHS Compliant=Yes, Stock=11967525, Supplier=Digikey, Technology="METAL GLAZE/THICK FILM", Terminal Finish=Nickel, Termination=Wraparound
R23: library part CMP-03412-019294-1, "RES SMD 1.5K OHM 0.5% 1/16W 0402", Manufacturer=Yageo, Manufacturer Part Number=RT0402DRD071K5L, Package=RT0402, Power Rating=0.063W, Resistance=1.5KΩ, Temperature="-55°C to +155°C", Temperature Coefficient="25 ppm/°C", Temperature Range High=+155°C, Temperature Range Low=-55°C, Tolerance=0.005, Voltage Rating=50V, Automotive=No, Category=Res, ComponentLink2Description=Datasheet, ComponentLink2URL=http://www.yageo.com/documents/recent/PYu-RT_1-to-0.01_RoHS_L_9.pdf, Composition="Thin Film", Device Class L1="Passive Components", Device Class L2=Resistors, Device Class L3="Chip SMD Resistors", Digikey Description="RES SMD 1.5K OHM 0.5% 1/16W 0402", Footprint Url=http://www.yageo.com/exep/pages/download/literatures/PYu-R_Mount_10.pdf, Height=0.35mm, Ipc Land Pattern Name=RESC10050X30, Lead Free=Yes, Mouser Description="Res Thin Film 0402 1.5K Ohm 0.5% 1/16W ±25ppm/°C Molded SMD Paper T/R", Octopart=https://octopart.com/rt0402drd071k5l-yageo-1260316, RoHS=TRUE, Series=RT
R27: library part RC0402FR-073K01L, "Res Thick Film 0402 3.01K Ohm 1% 1/16W ±100ppm/°C Molded SMD Paper T/R", Case Code (Imperial)=0402, Manufacturer="Yageo Group", Max Operating Temperature=155°C, Max Power Dissipation=63mW, Min Operating Temperature=-55°C, Power Rating=62.5mW, Resistance=3.01kΩ, Temperature Coefficient=100ppm/°C, Tolerance=1%, Voltage Rating=50V, Case/Package=0402, Category="Chip SMD Resistors", China RoHS=Non-Compliant, ComponentLink1Description=https://datasheet.octopart.com:443/RC0402FR-073K01L-Yageo-datasheet-175887523.pdf?src-supplier=IHS, ComponentLink1URL=https://datasheet.octopart.com:443/RC0402FR-073K01L-Yageo-datasheet-175887523.pdf?src-supplier=IHS, ComponentLink2Description=https://datasheet.octopart.com:443/RC0402FR-073K01L-Yageo-datasheet-103092701.pdf?src-supplier=Upverter, ComponentLink2URL=https://datasheet.octopart.com:443/RC0402FR-073K01L-Yageo-datasheet-103092701.pdf?src-supplier=Upverter, ComponentLink3Description=https://datasheet.octopart.com:443/RC0402FR-073K01L-Yageo-Group-datasheet-190305687.pdf?src-supplier=Future+Electronics, ComponentLink3URL=https://datasheet.octopart.com:443/RC0402FR-073K01L-Yageo-Group-datasheet-190305687.pdf?src-supplier=Future+Electronics, ComponentLink4Description=https://datasheet.octopart.com:443/RC0402FR-073K01L-Yageo-datasheet-164759695.pdf?src-supplier=Future+Electronics, ComponentLink4URL=https://datasheet.octopart.com:443/RC0402FR-073K01L-Yageo-datasheet-164759695.pdf?src-supplier=Future+Electronics, ComponentLink5Description=https://datasheet.octopart.com:443/RC0402FR-073K01L-Yageo-datasheet-137700087.pdf?src-supplier=Future+Electronics, ComponentLink5URL=https://datasheet.octopart.com:443/RC0402FR-073K01L-Yageo-datasheet-137700087.pdf?src-supplier=Future+Electronics, ComponentLink6Description=https://datasheet.octopart.com:443/RC0402FR-073K01L-Yageo-datasheet-12531192.pdf?src-supplier=Future+Electronics, ComponentLink6URL=https://datasheet.octopart.com:443/RC0402FR-073K01L-Yageo-datasheet-12531192.pdf?src-supplier=Future+Electronics, ComponentLink7Description=https://datasheet.octopart.com:443/RC0402FR-073K01L-Yageo-datasheet-505231.pdf?src-supplier=Future+Electronics, ComponentLink7URL=https://datasheet.octopart.com:443/RC0402FR-073K01L-Yageo-datasheet-505231.pdf?src-supplier=Future+Electronics, ComponentLink8Description=https://datasheet.octopart.com:443/RC0402FR-073K01L-Yageo-datasheet-10408619.pdf?src-supplier=Newark, ComponentLink8URL=https://datasheet.octopart.com:443/RC0402FR-073K01L-Yageo-datasheet-10408619.pdf?src-supplier=Newark, ComponentLink9Description=https://datasheet.octopart.com:443/RC0402FR-073K01L-Yageo-datasheet-62067350.pdf?src-supplier=Newark, ComponentLink9URL=https://datasheet.octopart.com:443/RC0402FR-073K01L-Yageo-datasheet-62067350.pdf?src-supplier=Newark, ComponentLink10Description=https://datasheet.octopart.com:443/RC0402FR-073K01L-Yageo-Group-datasheet-176638170.pdf?src-supplier=TME, ComponentLink10URL=https://datasheet.octopart.com:443/RC0402FR-073K01L-Yageo-Group-datasheet-176638170.pdf?src-supplier=TME, ComponentLink11Description=https://datasheet.octopart.com:443/RC0402FR-073K01L-Yageo-Group-datasheet-189192902.pdf?src-supplier=TME, ComponentLink11URL=https://datasheet.octopart.com:443/RC0402FR-073K01L-Yageo-Group-datasheet-189192902.pdf?src-supplier=TME, ComponentLink12Description=https://datasheet.octopart.com/RC0402FR-073K01L-Yageo-datasheet-73766026.pdf, ComponentLink12URL=https://datasheet.octopart.com/RC0402FR-073K01L-Yageo-datasheet-73766026.pdf, ComponentLink13Description=http://sigma.octopart.com:80/conflict_mineral_statement/Yageo-company-3.pdf?src-supplier=Compliance+Statements, ComponentLink13URL=http://sigma.octopart.com:80/conflict_mineral_statement/Yageo-company-3.pdf?src-supplier=Compliance+Statements, ComponentLink14Description=http://sigma.octopart.com:80/rohs_statement/Yageo-company-2.pdf?src-supplier=Compliance+Statements, ComponentLink14URL=http://sigma.octopart.com:80/rohs_statement/Yageo-company-2.pdf?src-supplier=Compliance+Statements, Composition="Thick Film", Contact Plating=Tin, Country of Origin="Mainland China, Taiwan", Depth=500µm, Export Control Classification Number (ECCN) Code=EAR99, Features="Moisture Resistant", Harmonized Tariff Schedule (HTS) Code=8533.21.00.30, Height=350µm, Introduction Date=2004-10-04, Lead Free="Lead Free", Length=1mm, Lifecycle Status=Production, Manufacturer Part Number=RC0402FR-073K01L, Military Standard=Not, Mount="Surface Mount", Number of Terminals=2, Number of Terminations=2, Pricing 1="1=0.1, 10=0.021, 25=0.0152, 50=0.012, 100=0.0097, 250=0.0074, 500=0.00612, 1000=0.00512, 5000=0.00355 (USD)", REACH SVHC=Unaffected, RoHS=Compliant, Schedule B="8533210045, 8533210045|8533210045|8533210045|8533210045|8533210045|8533210045|8533210045|8533210045|8533210045|8533210045|8533210045|8533210045|8533210045, 8533210045|8533210045|8533210045|8533210045|8533210045|8533210045|8533210045|8533210045|8533210045|8533210045|8533210045|8533210045|8533210045|8533210045, 8533210045|8533210045|8533210045|8533210045|8533210045|8533210045|8533210045|8533210045|8533210045|8533210045|8533210045|8533210045|8533210045|8533210045|8533210045", Stock 1=575918, Supplier 1=DigiKey, Termination=SMD/SMT, Voltage Rating (DC)=50V, Width=500µm, Working Voltage=50V
T1: library part CMP-03913-90391213-2, "Xfmr, 10/100/1000 Base-T, 0.5 Port, Smd Rohs Compliant: Yes", Inductance=350µH, Max Operating Temperature=105°C, Min Operating Temperature=-40°C, Height=3.25mm, Number of Pins=12, Pitch=1.27mm, RoHS=Non-Compliant, Width=8.6mm
U1: "Ethernet Bridge, USB to Ethernet USB 2.0, 10/100 Base-T/TX PHY USB Interface 56-QFN (8x8)", Ambient Temperature Range High=85°C, Manufacturer=Microchip, Manufacturer Lifecycle Status=REL, Max Supply Voltage=3.6V, Min Operating Temperature=-40°C, Min Supply Voltage=3V, Operating Supply Voltage=3.3V, Category="Ethernet Controller", ComponentLink1Description=https://datasheet.octopart.com:443/LAN9500AI-ABZJ-TR-Microchip-datasheet-101746277.pdf?src-supplier=Augswan, ComponentLink1URL=https://datasheet.octopart.com:443/LAN9500AI-ABZJ-TR-Microchip-datasheet-101746277.pdf?src-supplier=Augswan, ComponentLink2Description=https://datasheet.octopart.com:443/LAN9500AI-ABZJ-TR-Microchip-datasheet-179437561.pdf?src-supplier=Microchip, ComponentLink2URL=https://datasheet.octopart.com:443/LAN9500AI-ABZJ-TR-Microchip-datasheet-179437561.pdf?src-supplier=Microchip, ComponentLink3Description=https://datasheet.octopart.com:443/LAN9500AI-ABZJ-TR-Microchip-datasheet-140259316.pdf?src-supplier=Microchip, ComponentLink3URL=https://datasheet.octopart.com:443/LAN9500AI-ABZJ-TR-Microchip-datasheet-140259316.pdf?src-supplier=Microchip, ComponentLink4Description=https://datasheet.octopart.com:443/LAN9500AI-ABZJ-TR-Microchip-datasheet-166046754.pdf?src-supplier=Microchip, ComponentLink4URL=https://datasheet.octopart.com:443/LAN9500AI-ABZJ-TR-Microchip-datasheet-166046754.pdf?src-supplier=Microchip, ComponentLink5Description=https://datasheet.octopart.com:443/LAN9500AI-ABZJ-TR-Microchip-datasheet-154741932.pdf?src-supplier=Electro+Sonic, ComponentLink5URL=https://datasheet.octopart.com:443/LAN9500AI-ABZJ-TR-Microchip-datasheet-154741932.pdf?src-supplier=Electro+Sonic, ComponentLink6Description=https://datasheet.octopart.com:443/LAN9500AI-ABZJ-TR-Microchip-datasheet-57590167.pdf?src-supplier=Future+Electronics, ComponentLink6URL=https://datasheet.octopart.com:443/LAN9500AI-ABZJ-TR-Microchip-datasheet-57590167.pdf?src-supplier=Future+Electronics, ComponentLink7Description=http://sigma.octopart.com:80/188454377/materials_sheet/Microchip-LAN9500AI-ABZJ-TR.pdf?src-supplier=Compliance+Statements, ComponentLink7URL=http://sigma.octopart.com:80/188454377/materials_sheet/Microchip-LAN9500AI-ABZJ-TR.pdf?src-supplier=Compliance+Statements, ComponentLink8Description=http://sigma.octopart.com:80/rohs_statement/Microchip-company-71.pdf?src-supplier=Compliance+Statements, ComponentLink8URL=http://sigma.octopart.com:80/rohs_statement/Microchip-company-71.pdf?src-supplier=Compliance+Statements, ComponentLink9Description=http://sigma.octopart.com:80/reach_statement/Microchip-company-70.pdf?src-supplier=Compliance+Statements, ComponentLink9URL=http://sigma.octopart.com:80/reach_statement/Microchip-company-70.pdf?src-supplier=Compliance+Statements, ComponentLink10Description=http://sigma.octopart.com:80/conflict_mineral_statement/Microchip-company-69.pdf?src-supplier=Compliance+Statements, ComponentLink10URL=http://sigma.octopart.com:80/conflict_mineral_statement/Microchip-company-69.pdf?src-supplier=Compliance+Statements, ComponentLink11Description=http://sigma.octopart.com:80/conflict_mineral_statement/Microchip-company-68.pdf?src-supplier=Compliance+Statements, ComponentLink11URL=http://sigma.octopart.com:80/conflict_mineral_statement/Microchip-company-68.pdf?src-supplier=Compliance+Statements, Contact Plating=Tin, Country of Assembly="Singapore, Taiwan", Country of Fabrication=Singapore, Country of Origin="Singapore, Taiwan", Data Rate=100Mbps, Export Control Classification Number (ECCN) Code=EAR99, Harmonized Tariff Schedule (HTS) Code=8542.31.0030, Height=1mm, HS Code=8542.31.0030, Interface="Ethernet, USB", Lead Free="Lead Free", Lifecycle Status=Production, Manufacturer Part Number=LAN9500AI-ABZJ-TR, Max Operating Temperature=85°C, Mount="Surface Mount", Number of Channels=1, Number of Pins=56, Pricing 1="1=6.57, 25=6.472 (USD)", Projected EOL Date=2039-03-03, Radiation Hardening=No, RoHS=Compliant, Schedule B="8542390000, 8542390000|8542390000|8542390000|8542390000|8542390000|8542390000|8542390000|8542390000|8542390000|8542390000|8542390000|8542390000|8542390000|8542390000|8542390000|8542390000|8542390000|8542390000|8542390000|8542390000|8542390000|8542390000|8542390000|85", Stock 1=17687, Supplier 1=DigiKey
U2: library part TL1963A-33DCYR_1, "IC REG LINEAR 3.3V 1.5A SOT223-4", Case/Package=SOP, Dropout Voltage1-Max=550mV, Dropout Voltage1-Nom=340mV, Input Voltage Absolute-Max=20V, LCSC Part Number=C181262, Manufacturer="Texas Instruments", Min Input Voltage=3.8V, Operating Temperature, TJ-Max=125°C, Operating Temperature, TJ-Min=-40°C, Output Current1-Max=1.5A, Output Voltage1-Max=3.4V, Output Voltage1-Min=3.2V, Output Voltage1-Nom=3.3V, Package Body Material=Plastic, Package Shape=Rectangular, Package Style="SMALL OUTLINEMeter", Peak Reflow Temperature (Cel)=260°C, Supplier Part Number=296-24897-1-ND, Voltage Tolerance-Max=3%, Adjustability=FIXED, Category="Voltage Regulators - Linear", Channels=1, ComponentLink1Description=https://www.ti.com:443/lit/ds/symlink/tl1963a.pdf?src-supplier=IHS+Markit, ComponentLink1URL=https://www.ti.com:443/lit/ds/symlink/tl1963a.pdf?src-supplier=IHS+Markit, ComponentLink2Description=https://datasheet.ciiva.com/2046/-2046068.pdf?src-supplier=Digikey, ComponentLink2URL=https://datasheet.ciiva.com/2046/-2046068.pdf?src-supplier=Digikey, Height - Seated (Max)=1.8mm, JESD-30 Code=R-PDSO-G4, JESD-609 Code=e3, Length=6.5mm, Line Regulation-Max=0.01%, Load Regulation-Max=0.07%, Manufacturer Part Number=TL1963A-33DCYR, Max Supply Voltage=20V, Moisture Sensitivity Level=2, Number of Outputs=1, Packaging="Tape and Reel", Pins=4, Pricing="1=2.91, 10=2.614, 25=2.4712, 100=2.1417, 250=2.03188, 500=1.8232, 1000=1.53764 (USD)", Qualification Status="Not Qualified", Reach SVHC Compliant=Yes, Regulator Type="FIXED POSITIVE SINGLE OUTPUT LDO REGULATOR", RoHS=Yes, RoHS Compliant=Yes, Stock=4105, Supplier=Digikey, Surface Mount=Yes, Technology=BIPOLAR, Terminal Finish=Tin, Terminal Form="Gull Wing", Terminal Pitch=2.3mm, Terminal Position=DUAL, Width=3.5mm